# EAGLE board 3035 schematic (EAGLE 9.6.1)
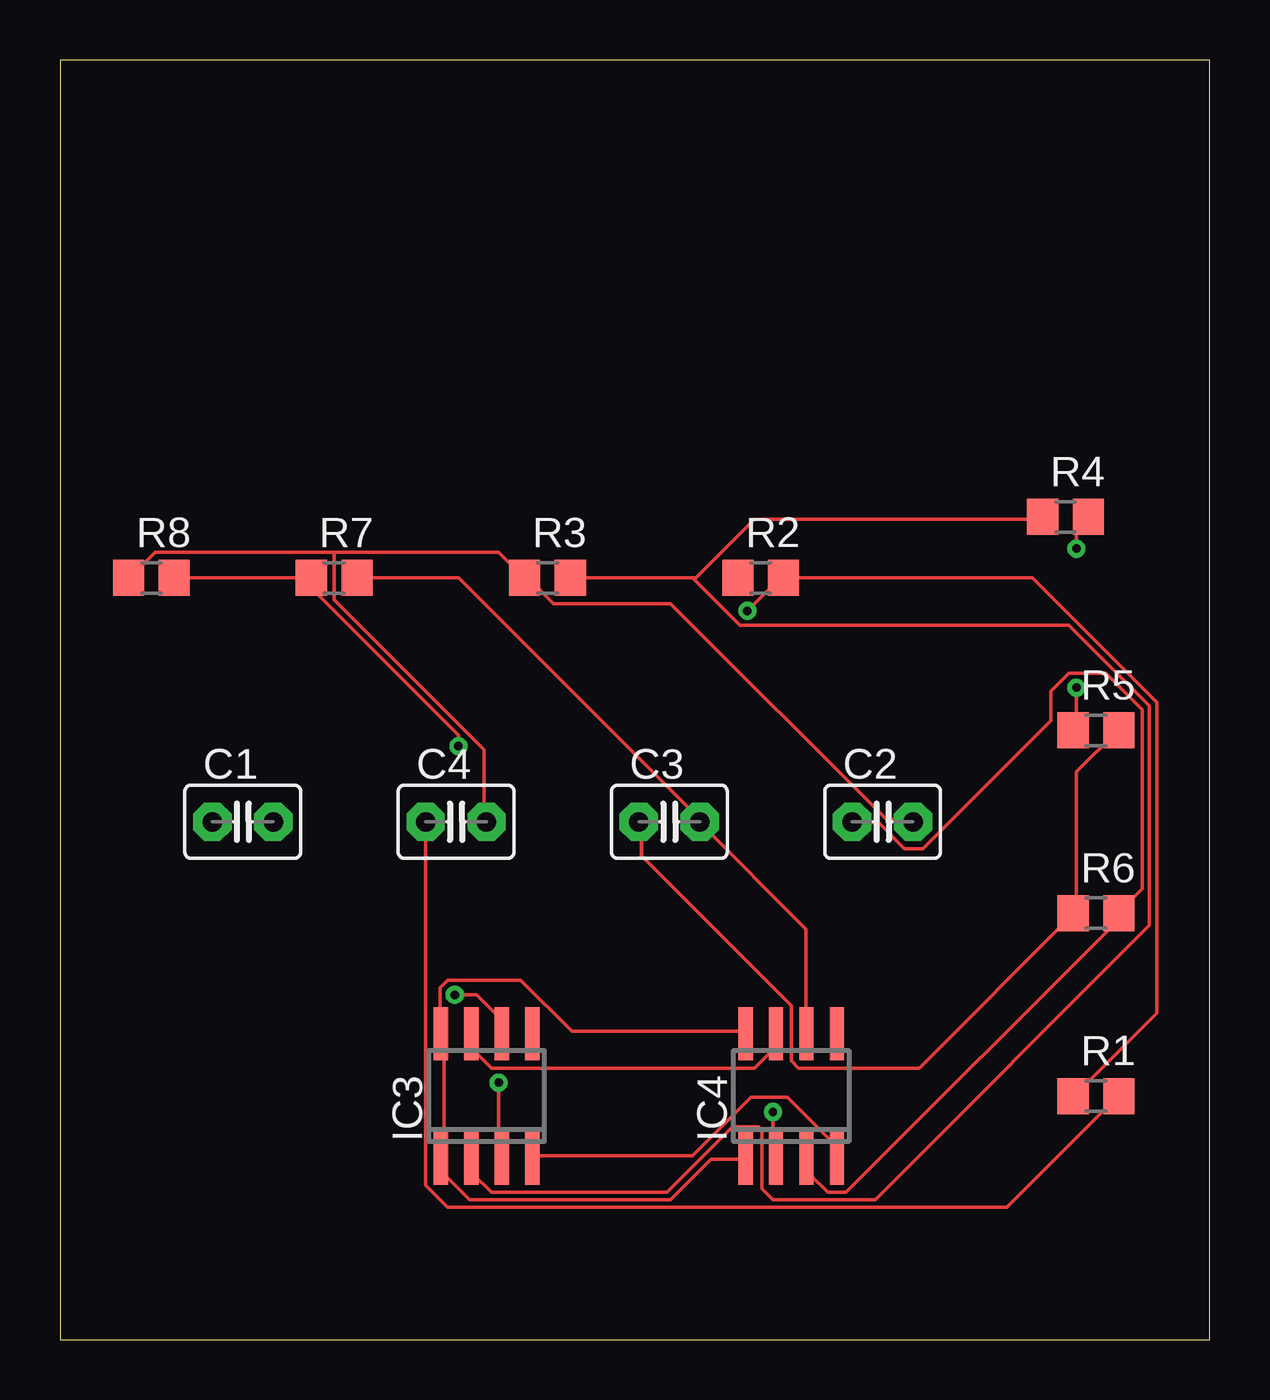
[diagram p0: board, top side]
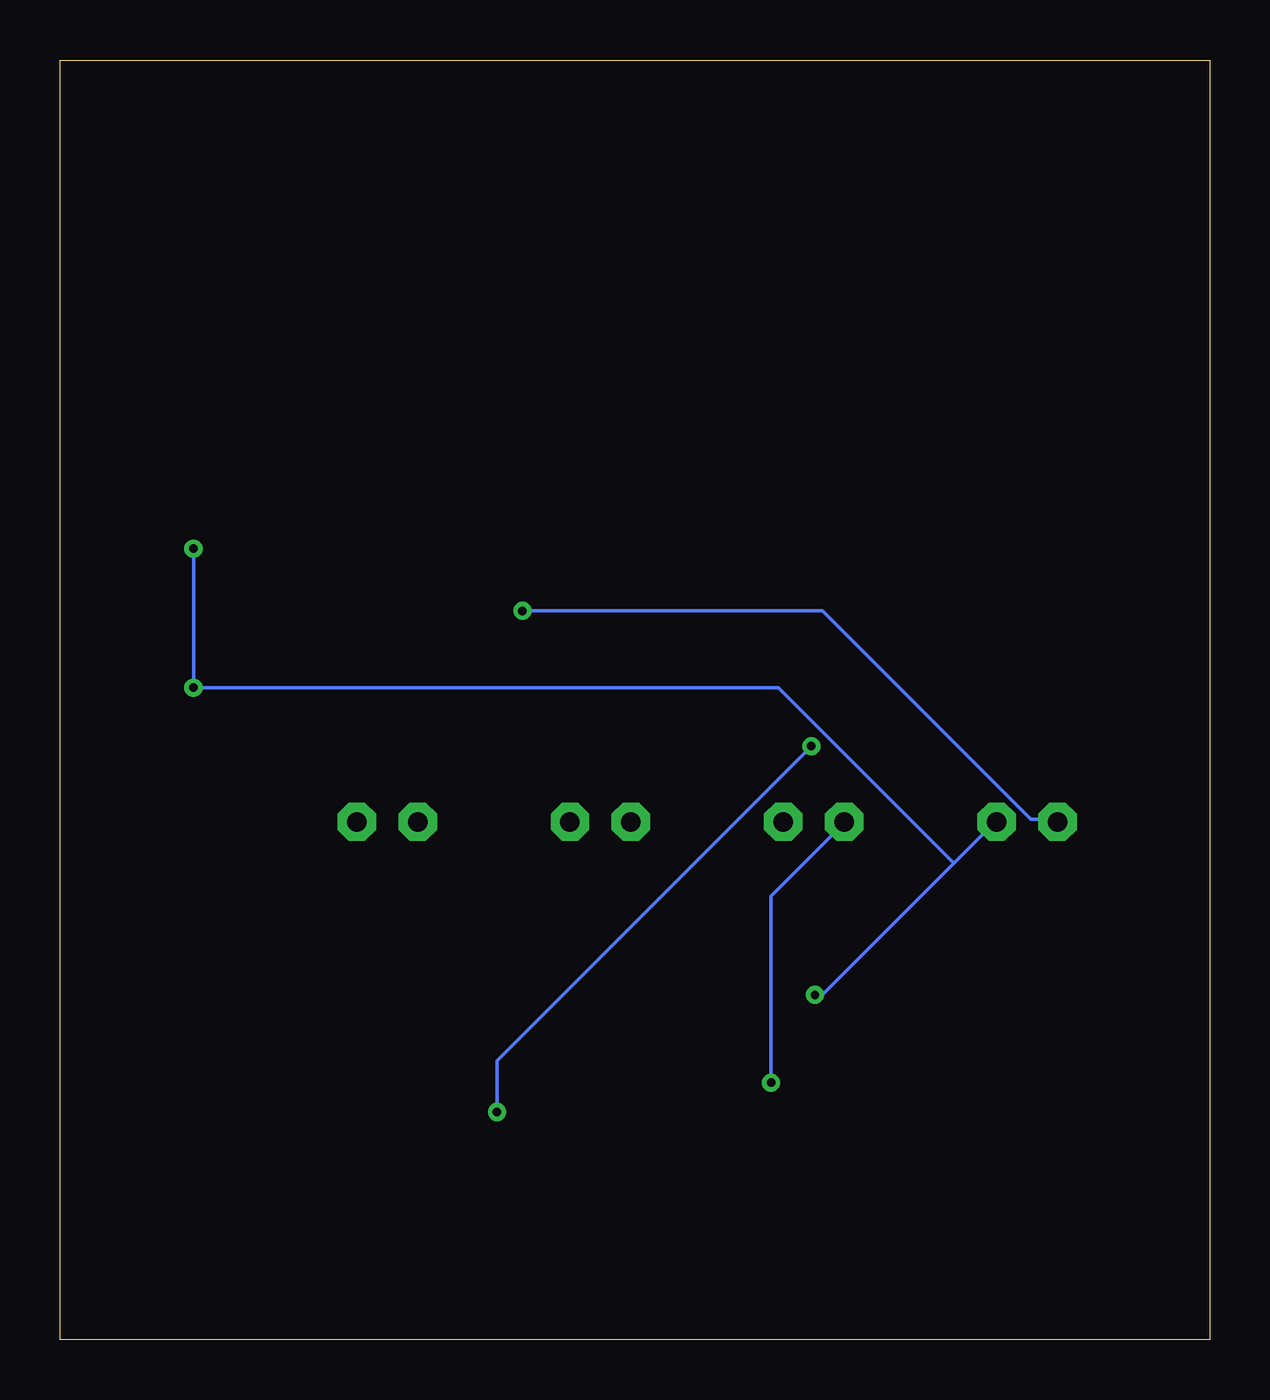
[diagram p1: board, bottom side, seen from below]

Size 47.93 x 53.33 mm. Coordinates in mm from the lower left corner, seen from the top.
Outline: 0,0 47.93,0 47.93,53.33 0,53.33 0,0
Copper layers (1*16): Top 0.035mm / dielectric 1.5mm / Bottom 0.035mm
Design rules "default": minimum track width 6mil, minimum drill 0.35mm, track to track 6mil, track to pad 6mil, pad to pad 6mil, via to via 6mil, smd to smd 6mil, copper to edge 40mil, drill to drill 6mil, minimum pad ring 10mil, minimum via ring 8mil, stop-mask expansion 4mil, vias tented up to drill 0mil, thermal gap 10mil

## Footprints (pad centres in the part's own frame; a part is rotated, then mirrored left to right if it is on the bottom)
C2.5-3 = drill 0.813 pad 1.6 octagon: 1 -1.27,0; 2 1.27,0
SO08 = smd 0.6 x 2.2: 1 -1.905,-2.6; 2 -0.635,-2.6; 3 0.635,-2.6; 4 1.905,-2.6; 5 1.905,2.6; 6 0.635,2.6; 7 -0.635,2.6; 8 -1.905,2.6
R0805 = smd 1.3 x 1.5: 1 -0.95,0; 2 0.95,0

## Placement (x,y rotation side)
C1  470n  [C2.5-3]  7.62,21.59 0 top
C2  470n  [C2.5-3]  34.29,21.59 0 top
C3  470n  [C2.5-3]  25.4,21.59 0 top
C4  470n  [C2.5-3]  16.51,21.59 0 top
IC3  LM741D  [SO08]  17.78,10.16 0 top
IC4  LM741D  [SO08]  30.48,10.16 0 top
R1  330  [R0805]  43.18,10.16 0 top
R2  330  [R0805]  29.21,31.75 0 top
R3  1k  [R0805]  20.32,31.75 0 top
R4  152  [R0805]  41.91,34.29 0 top
R5  330  [R0805]  43.18,25.4 0 top
R6  330  [R0805]  43.18,17.78 0 top
R7  1k  [R0805]  11.43,31.75 0 top
R8  820  [R0805]  3.81,31.75 0 top

## Library data of the parts
C1-C4 = capacitor-wima
IC3 IC4 = linear
R1-R8 = rcl; SPICEPREFIX: R

## Nets
GND: C2.2 C4.2 R3.1 R8.1
N$1: C4.1 IC3.3 R1.2
N$2: C1.1 R1.1 R2.2
N$3: IC3.2 R3.2 R4.1
N$4: C1.2 IC3.6 R4.2 R5.1
N$5: C2.1 IC4.3 R6.2
N$6: C3.1 R5.2 R6.1
N$7: C3.2 IC4.6 R7.2
N$8: IC4.2 R7.1 R8.2
N$9: R2.1
V+: IC3.7 IC4.7
V-: IC3.4 IC4.4
VCC: IC3.1 IC3.8 IC4.1 IC4.8

## Tracks (layer width: path | path; a pad name or v marks a point on that pad's centre or on a via)
GND
  Top 0.152: 11.43,32.82 18.29,32.82 19.36,31.75 R3.1 19.51,31.75 20.57,30.68 25.45,30.68 34.44,21.69 35.51,21.69 C2.2 | 11.43,32.82 3.96,32.82 2.9,31.75 R8.1 | 11.43,32.82 11.43,30.84 17.68,24.59 17.68,21.69 C4.2
N$1  (via drill 0.35)
  Top 0.152: C4.1 15.24,6.45 16.15,5.54 39.47,5.54 44.04,10.11 R1.2 | v18.29,10.72 18.29,7.67 IC3.3
  Bottom 0.152: v18.29,10.72 18.29,18.49 15.24,21.54 C4.1
N$2  (via drill 0.35)
  Top 0.152: R1.1 42.37,10.26 45.72,13.61 45.72,26.57 40.54,31.75 R2.2 30.02,31.75 v28.65,30.38
  Bottom 0.152: v28.65,30.38 16.15,30.38 7.47,21.69 6.4,21.69 C1.1
N$3
  Top 0.152: 26.36,31.75 26.52,31.75 28.96,34.19 40.84,34.19 R4.1 | 26.36,31.75 R3.2 | 26.36,31.75 28.35,29.77 42.06,29.77 45.41,26.42 45.41,17.27 33.98,5.84 29.72,5.84 29.26,6.3 29.26,8.74 29.11,8.89 28.04,8.89 25.3,6.15 17.98,6.15 17.22,6.91 17.22,7.52 IC3.2
N$4  (via drill 0.35)
  Top 0.152: v42.37,27.18 42.37,25.5 R5.1 | v42.37,32.97 42.37,33.73 42.82,34.19 R4.2 | v16.46,14.38 17.37,14.38 18.29,13.46 18.29,12.85 IC3.6
  Bottom 0.152: v42.37,32.97 v42.37,27.18 17.98,27.18 10.67,19.86 | v16.46,14.38 16.15,14.38 10.67,19.86 | 10.67,19.86 8.99,21.54 C1.2
N$5
  Top 0.152: IC4.3 31.24,7.52 31.24,6.91 32,6.15 32.77,6.15 44.04,17.42 44.04,17.73 R6.2 44.2,17.88 45.11,18.8 45.11,26.26 43.59,27.79 42.06,27.79 41.3,27.03 41.3,25.81 35.97,20.47 35.2,20.47 34.14,21.54 33.07,21.54 C2.1
N$6
  Top 0.152: R5.2 44.04,25.35 42.37,23.67 42.37,17.88 R6.1 42.22,17.73 35.81,11.33 30.79,11.33 30.48,11.63 30.48,13.92 24.23,20.17 24.23,21.54 C3.1
N$7
  Top 0.152: R7.2 16.61,31.75 26.67,21.69 C3.2 26.67,21.54 31.09,17.12 31.09,12.85 IC4.6
N$8  (via drill 0.35)
  Top 0.152: R8.2 R7.1 10.52,31.75 10.52,31.29 16.61,25.2 v16.61,24.74 | v29.72,9.5 29.72,7.67 IC4.2
  Bottom 0.152: v29.72,9.5 29.72,11.63 v16.61,24.74
V+
  Top 0.152: IC3.7 17.22,12.7 17.22,12.09 17.98,11.33 28.96,11.33 29.72,12.09 29.72,12.7 IC4.7
V-
  Top 0.152: IC3.4 19.81,7.67 26.36,7.67 28.8,10.11 30.33,10.11 32.31,8.13 32.31,7.67 IC4.4
VCC
  Top 0.152: IC4.1 28.5,7.52 27.13,7.52 25.45,5.84 17.07,5.84 16,6.91 16,7.52 IC3.1 16,7.67 16,12.7 IC3.8 15.85,12.85 15.85,14.68 16.15,14.99 19.2,14.99 21.34,12.85 28.5,12.85 IC4.8